# Altium PCB stepperdriver.PcbDoc
Units mil, origin at the board's own origin, x right, y up, seen from the top; angles counter-clockwise.
Board outline 1665 x 1670 mil, 2 copper layers (Top Layer, Bottom Layer); 25 components, 26 nets, 114 pads, 5 vias.
Unrouted connection lines stored in the file: 5.
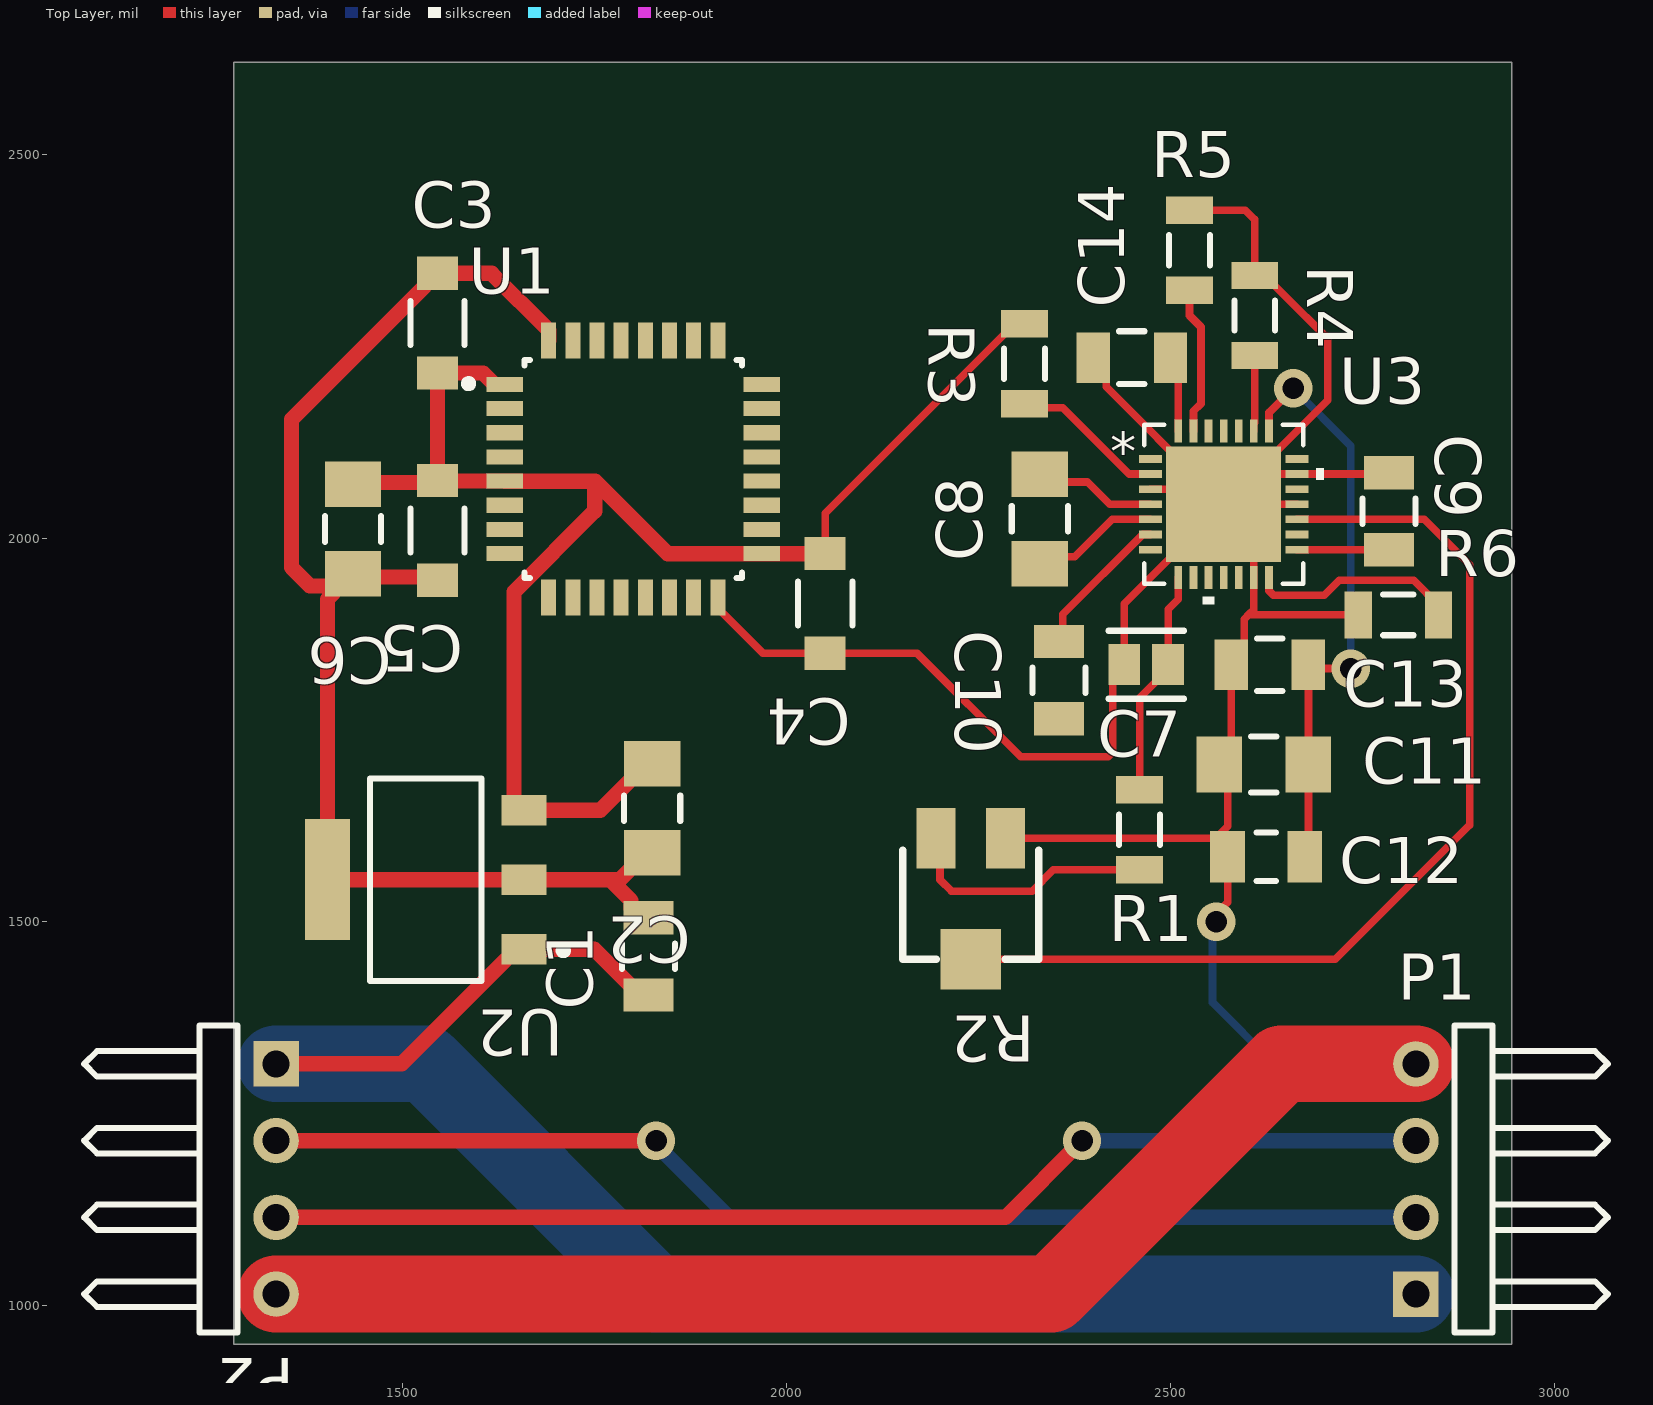
[diagram p0: Top Layer view]
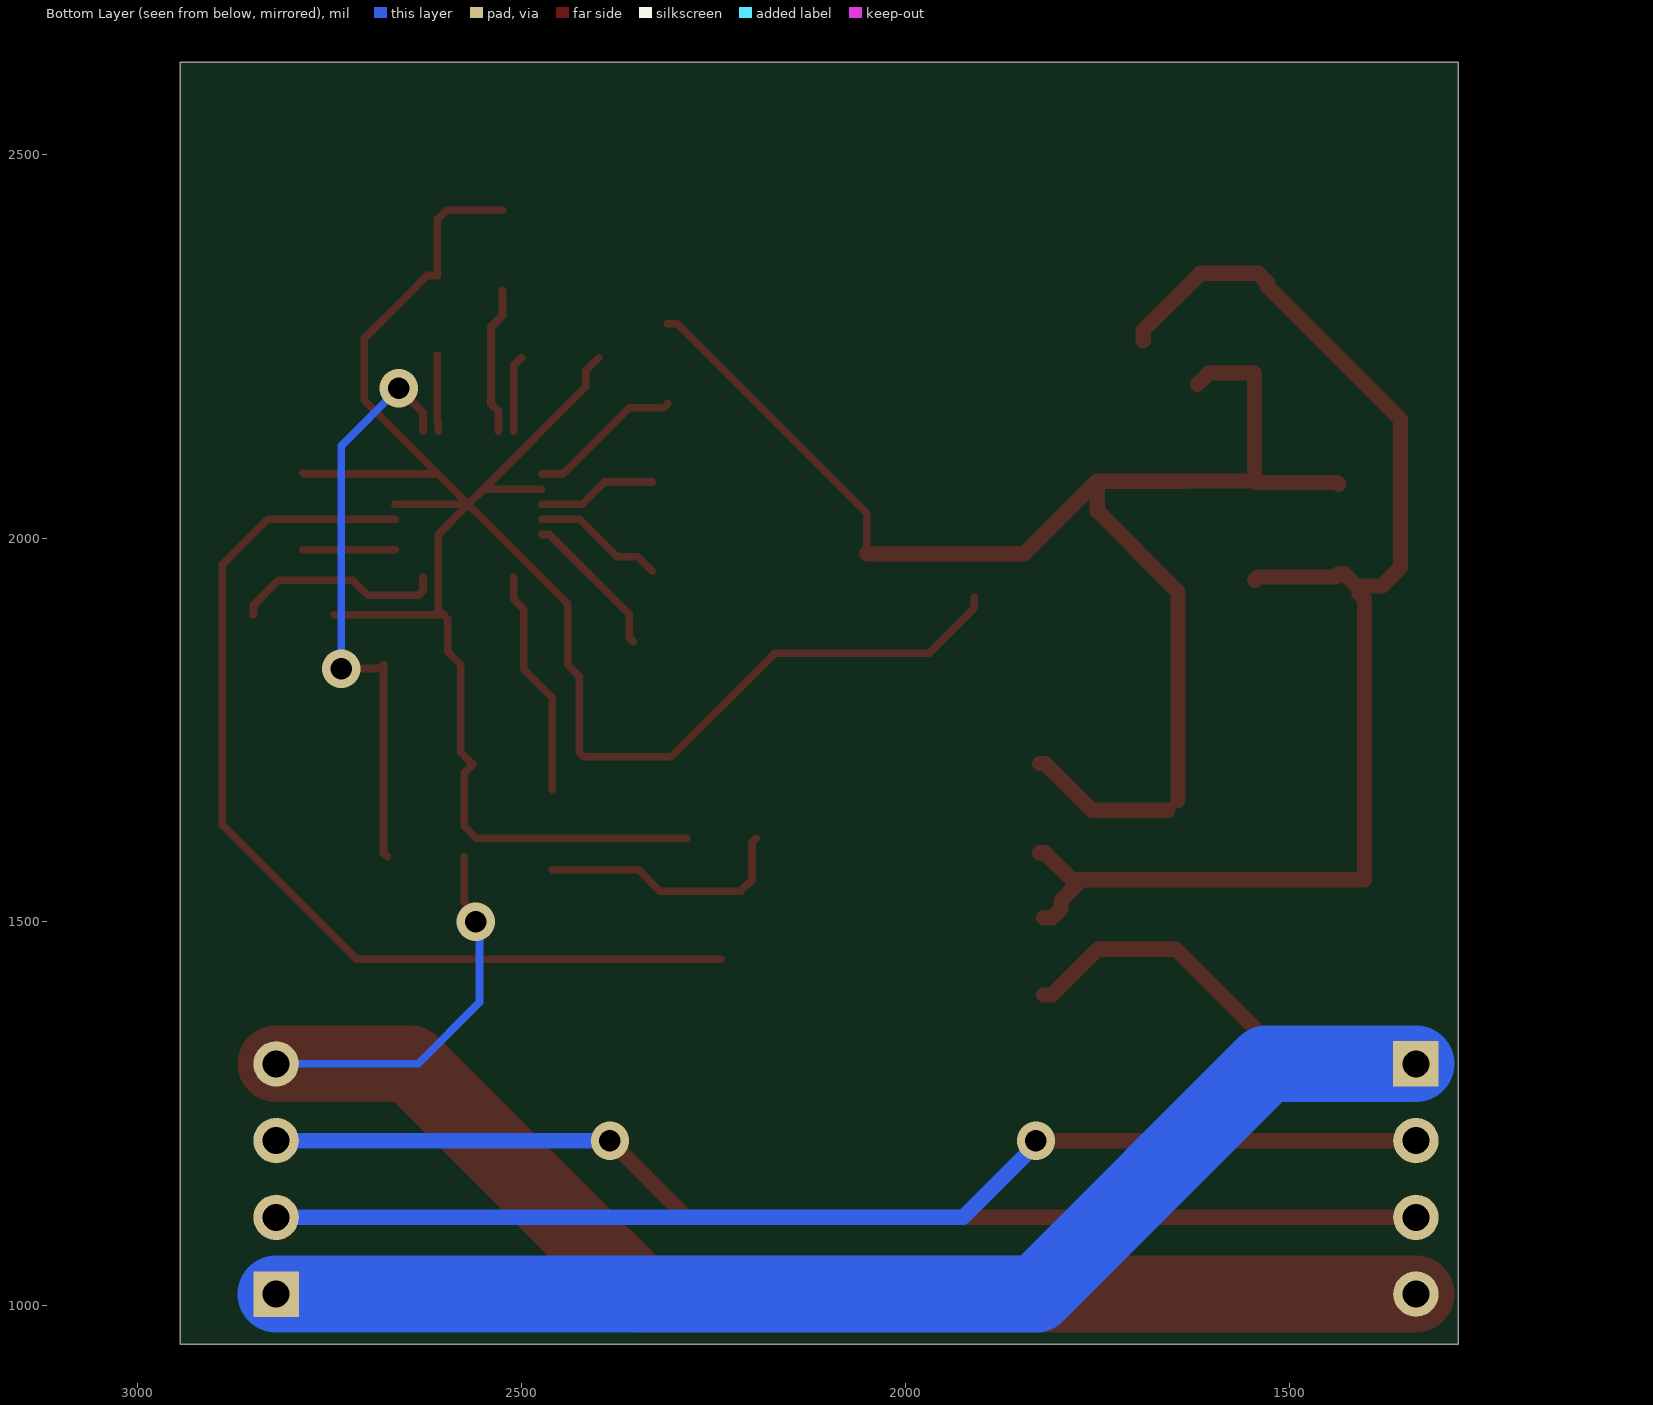
[diagram p1: Bottom Layer view, seen from below]
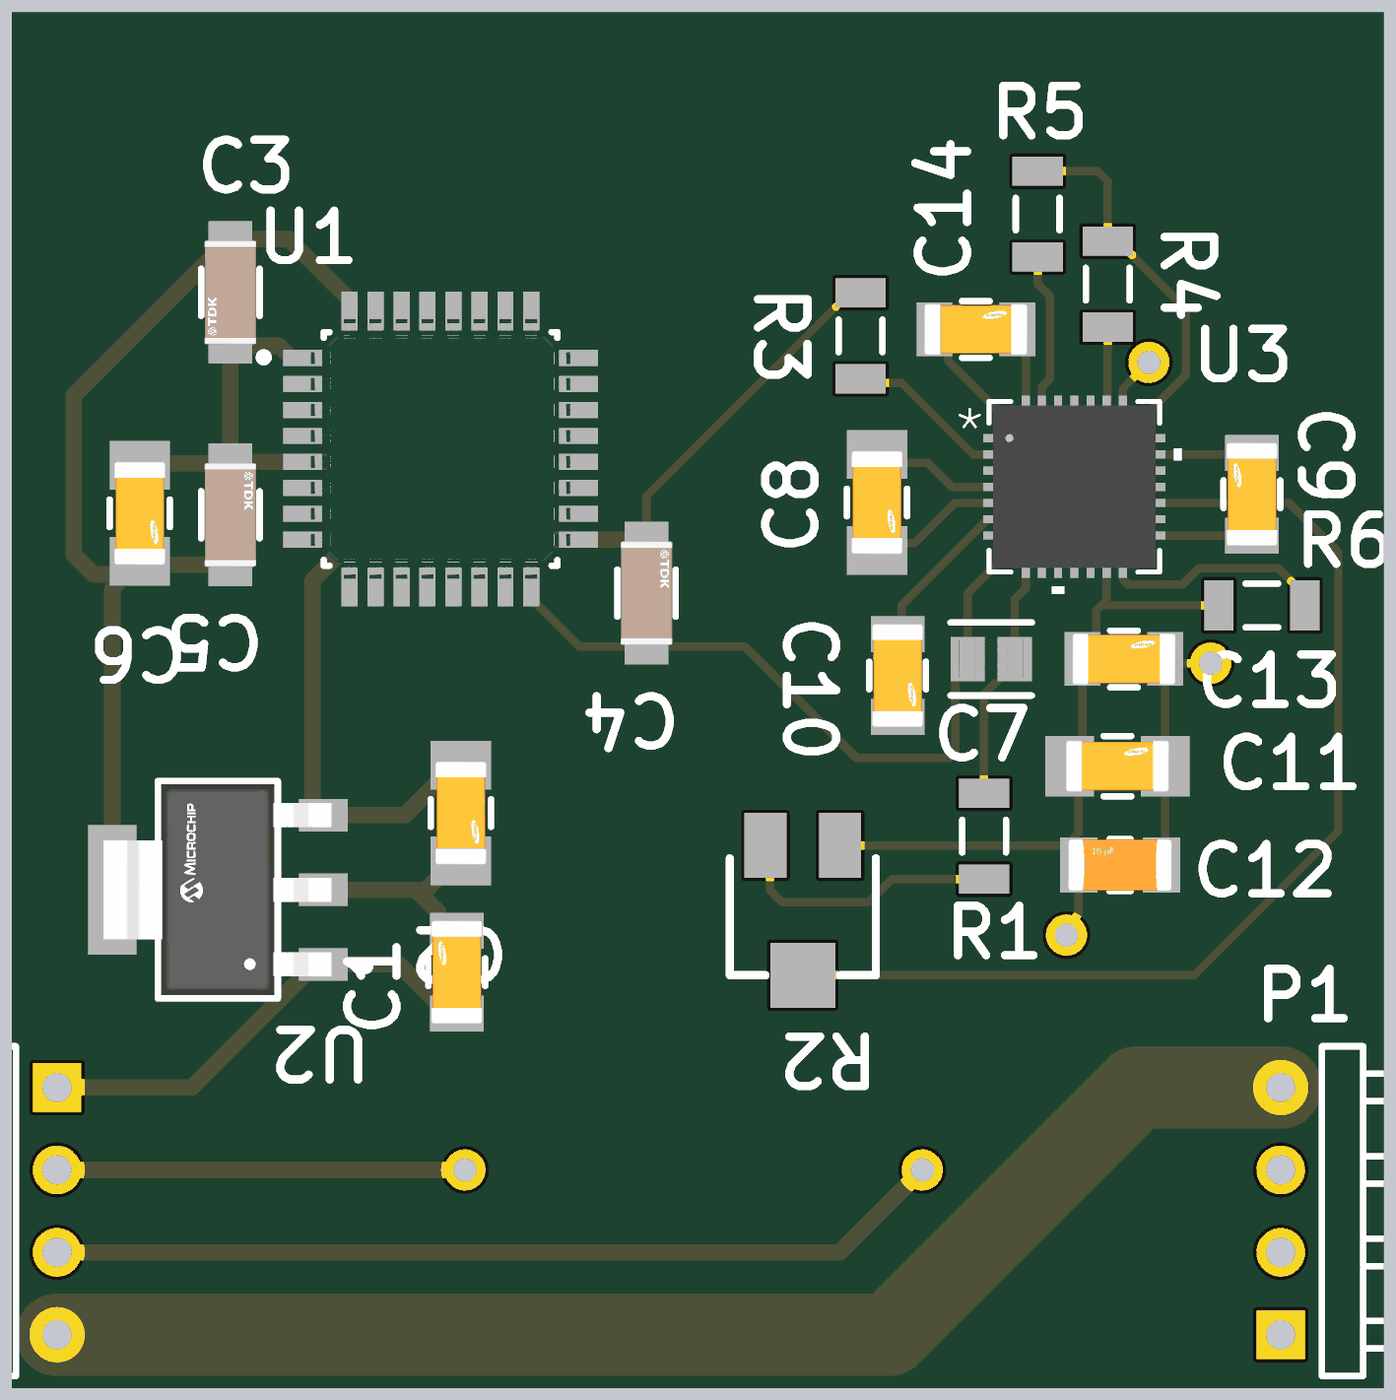
[diagram p2: 3D render of the assembled board from above, using the file's embedded part models]

## Layer stack, top to bottom
Top Solder: solder mask 0.4, Solder Resist, Dk 3.5
Top Layer: signal copper 1.4
Dielectric 1: dielectric 12.6, FR-4, Dk 4.8
Bottom Layer: signal copper 1.4
Bottom Solder: solder mask 0.4, Solder Resist, Dk 3.5

## Board outline
1280,950 2945,950 2945,2620 1280,2620

## Design rules (kind name [scope] priority, off if disabled: settings)
Clearance Clearance_1 [All] p1: gap=0 ignorepadtopadclearanceinfootprint=FALSE
Clearance [All] p2: gap=0 ignorepadtopadclearanceinfootprint=FALSE
PolygonConnect [All] p1: connectstyle=Relief reliefconductorwidth=10 reliefentries=4 polygonreliefangle="90 Angle" airgapwidth=10
RoomDefinition stepperDriver [InComponentClass('stepperDriver')] p1: confinementstyle=ConfineIn formatcopy=TRUE lockcomponents=FALSE outline 2930,960 8720,960 8720,1480 2930,1480
RoutingVias [All] p1: holewidth=28 width=50 viastyle="Through Hole" minholewidth=28 minwidth=50 maxholewidth=28 maxwidth=50
SolderMaskExpansion [All] p1: expansion=4 istentingtop=FALSE
Width [All] p1: maxlimit=200 minlimit=10 preferedwidth=20 minimp=50.000000 maximp=50.000000 favimp=50.000000
30 further rules are at their usual default settings.

## Components (designator, comment, footprint, x,y, rotation, side; value= is the part's Value field where it differs from the comment)
C1 "0.33uF" FP-CL31-IPC_C#1 1820,1455 r90 top
C2 "10uF" FP-CL31-IPC_A 1825,1648.12 r270 top
C3 "0.1uF" FP-CGA5L-MFG 1545.32,2280 r90 top value=100nF
C4 "0.1uF" FP-CGA5L-MFG 2050.32,1915 r270 top value=100nF
C5 "0.1uF" FP-CGA5L-MFG 1545.32,2010 r270 top value=100nF
C6 "1uF" FP-CL31-IPC_A 1435.32,2011.88 r270 top
C7 "4.7uF" FP-CL21-IPC_C 2468.57,1835 r0 top
C8 "22nF" FP-CL31-IPC_A 2330,2025 r270 top
C9 "100nF" FP-CL31-IPC_C#1 2785,2035 r90 top
C10 "100nF" FP-CL31-IPC_C#1 2355,1815 r270 top
C11 "1uF" FP-CL31-IPC_A 2621.88,1705 r0 top
C12 "10uF" FP-CL31-IPC_C#2 2625,1585 r0 top
C13 "100nF" FP-CL31-IPC_C#1 2629.75,1835 r0 top
C14 "100nF" FP-CL31-IPC_C#1 2450,2235 r0 top
P1 "in" HDR1X4H 2820,1015 r90 top
P2 "out" HDR1X4H 1335,1315 r270 top
R1 "20k" RESC3216X70X50LL05T20 2460,1620 r90 top
R2 "20K" RTRIMTS53YJ 2240,1530 r180 top
R3 "20k" RESC3216X70X50LL05T20 2310,2227.17 r270 top
R4 "0r11" RESC3216X70X50LL05T20 2610,2290 r270 top
R5 "0r11" RESC3216X70X50LL05T20 2525,2375 r270 top
R6 "20k" RESC3216X70X50LL05T20 2797.17,1900 r0 top
U1 "STM32L010K8T6" FP-LQFP32-5V-MFG 1800.32,2090 r0 top
U2 "MIC5209-3.3YS-TR" FP-SOT223-3LD-PL-1-MFG 1530,1555 r180 top
U3 "TMC2209-LA" QFN28_5X5_TRI 2569.5,2044.06 r0 top

## Footprints (in the part's own frame and the unit in brackets; to place one, negate y for a bottom-side part, rotate by r counter-clockwise, add the part's x,y. Pads: shape width x height; smd on the part's side, far side on the other; paste and mask are expansions set on the pad)
FP-CGA5L-MFG [mm]
  rect 1.1x1.35 smd paste+0 mask+0: 1(-1.65,0) 2(1.65,0)
  silkscreen extent -0.73,-0.9 0.73,0.9, body extent -2.3,-1 2.3,1, height 0.25
FP-CL21-IPC_C [mil]
  rect 41.52x53.39 smd paste+0 mask+0: 1(-28.57,0) 2(28.57,0)
  silkscreen extent -49,-44 49,44, body extent -53,-32 53,32, height 10
FP-CL31-IPC_A [mil]
  rect 59.27x73.16 smd paste+0 mask+0: 1(-58.12,0) 2(58.12,0)
  silkscreen extent -17,-37 17,37, body extent -107,-56 107,56, height 10
FP-CL31-IPC_C#1 [mil]
  rect 43.52x65.28 smd paste+0 mask+0: 1(-50.25,0) 2(50.25,0)
  silkscreen extent -17,-34 17,34, body extent -76,-38 76,38, height 10
FP-CL31-IPC_C#2 [mil]
  rect 45.45x67.17 smd paste+0 mask+0: 1(-50.23,0) 2(50.23,0)
  silkscreen extent -13,-31 13,31, body extent -77,-39 77,39, height 10
FP-LQFP32-5V-MFG [mm]
  rect 1.2x0.5 smd paste+0 mask+0: 1(-4.25,2.8) 2(-4.25,2) 3(-4.25,1.2) 4(-4.25,0.4) 5(-4.25,-0.4) 6(-4.25,-1.2) 7(-4.25,-2) 8(-4.25,-2.8) 17(4.25,-2.8) 18(4.25,-2) 19(4.25,-1.2) 20(4.25,-0.4) 21(4.25,0.4) 22(4.25,1.2) 23(4.25,2) 24(4.25,2.8)
  rect 0.5x1.2 smd paste+0 mask+0: 9(-2.8,-4.25) 10(-2,-4.25) 11(-1.2,-4.25) 12(-0.4,-4.25) 13(0.4,-4.25) 14(1.2,-4.25) 15(2,-4.25) 16(2.8,-4.25) 25(2.8,4.25) 26(2,4.25) 27(1.2,4.25) 28(0.4,4.25) 29(-0.4,4.25) 30(-1.2,4.25) 31(-2,4.25) 32(-2.8,4.25)
  silkscreen extent -5.57,-3.6 3.6,3.6, body extent -4.95,-4.95 4.95,4.95, height 0.25
FP-SOT223-3LD-PL-1-MFG [mm]
  rect 1.5x1 smd paste+0 mask+0: 1(-3.25,2.3) 2(-3.25,0) 3(-3.25,-2.3)
  rect 1.5x4 smd paste+0 mask+0: 4(3.25,0)
  silkscreen extent -4.68,-3.35 1.85,3.35, body extent -4.1,-3.45 4.1,3.45, height 0.25
HDR1X4H [mm] "Connector; Header; 4 Position; Right Angle"
  rect 1.5x1.5 hole 0.9: 1(0,0)
  round 1.5 hole 0.9: 2(2.54,0) 3(5.08,0) 4(7.62,0)
  silkscreen extent -1.27,-6.35 8.89,-1.27
QFN28_5X5_TRI [mil]
  rect 30x10 smd paste+0 mask+0: 1(-95.5,59.05) 2(-95.5,39.37) 3(-95.5,19.68) 4(-95.5,0) 5(-95.5,-19.69) 6(-95.5,-39.37) 7(-95.5,-59.06) 15(95.5,-59.06) 16(95.5,-39.37) 17(95.5,-19.69) 18(95.5,0) 19(95.5,19.68) 20(95.5,39.37) 21(95.5,59.05)
  rect 10x30 smd paste+0 mask+0: 8(-59.06,-95.5) 9(-39.37,-95.5) 10(-19.68,-95.5) 11(0,-95.5) 12(19.69,-95.5) 13(39.37,-95.5) 14(59.06,-95.5) 22(59.06,95.5) 23(39.37,95.5) 24(19.69,95.5) 25(0,95.5) 26(-19.68,95.5) 27(-39.37,95.5) 28(-59.06,95.5)
  rect 150x150 smd paste-74.5 mask+0: 29(0,0)
  silkscreen extent -104,-130 130,104, body extent -99,-99 99,99, height 65
RESC3216X70X50LL05T20 [mm] "Chip Resistor, 2-Leads, Body 3.20x1.60mm, IPC High Density"
  rect 0.9x1.55 smd: 1(-1.325,0) 2(1.325,0)
  silkscreen extent -0.5,-0.67 0.5,0.67, body extent -1.63,-0.82 1.62,0.82, height 0.7
RTRIMTS53YJ [mm]
  rect 1.3x2 smd: 1(-1.15,-2) 3(1.15,-2)
  rect 2x2 smd: 2(0,2)
  silkscreen extent -2.25,-1.6 2.25,2

## Part data
C1: library part CMP-13271-000138-1, "Cap Ceramic 330pF 50V C0G ±5% SMD 1206 +125°C Embossed T/R", Capacitance=330pF, Case Code (Imperial)=1206, Case Code (Metric)=3216, Dielectric=C0G, Max Operating Temperature=125°C, Min Operating Temperature=-55°C, Package Quantity=1, Temperature Coefficient=300ppm/°C, Tolerance=5%, Voltage=50V, Case/Package=1206, Depth=1.6mm, Height=0.85mm, Length=3.2mm, Material=Ceramic, Mount="Surface Mount", Packaging="Tape and Reel", Radiation Hardening=No, Thickness=0.039inch, Voltage Rating=50V, Width=0.063inch
C2: library part CMP-13271-002819-1, "Cap Ceramic 10uF 16V X5R ±10% SMD 1206 +85°C Embossed T/R", Case Code (Imperial)=1206, Case Code (Metric)=3216, Dielectric=X5R, Max Operating Temperature=85°C, Min Operating Temperature=-55°C, Tolerance=10%, Voltage=16V, Capacitance=10uF, Case/Package=1206, Contact Plating=Tin, Depth=1.6mm, Height=1.6mm, Lead Free="Lead Free", Length=3.2mm, Material=Ceramic, Mount="Surface Mount", Packaging="Tape and Reel", Radiation Hardening=No, Thickness=0.071inch, Voltage Rating=16V, Voltage Rating (DC)=16V, Width=0.063inch
C3 C4 C5: library part CMP-08246-000029-1, "CAP CER 0.1UF 50V C0G 1206", Capacitance=100nF, Manufacturer=TDK, Manufacturer Part Number=CGA5L2C0G1H104J160AA, Package=CGA5L, Temperature="-55°C to +125°C", Temperature Characteristic=C0G, Temperature Coefficient=30ppm/°C, Temperature Range High=+125°C, Temperature Range Low=-55°C, Tolerance=5%, Voltage Rating=50V, Automotive=Yes, Automotive Grade="Grade 1", Category=Cap, ComponentLink2Description=Datasheet, ComponentLink2URL=https://product.tdk.com/info/en/catalog/datasheets/mlcc_automotive_general_en.pdf, Device Class L1="Passive Components", Device Class L2=Capacitors, Device Class L3="Ceramic Capacitors", Digikey Description="CAP CER 0.1UF 50V C0G 1206", Height=1.8mm, Ipc Land Pattern Name=CAPC320160X160, Lead Free=Yes, Material=Ceramic, Mouser Description="Eia Case Size: 1206, Voltage: 50, Cap Value: 100000, Tol: +/-5%, Thickness: 1.60 ± 0.20", Octopart=https://octopart.com/cga5l2c0g1h104j160aa-tdk-26014808, RoHS=TRUE
C6 C11: library part CMP-13271-003959-1, "Cap Ceramic 1uF 16V Y5V -20/+80% SMD 1206 +85°C Embossed T/R", Case Code (Imperial)=1206, Case Code (Metric)=3216, Dielectric=Y5V, Max Operating Temperature=85°C, Min Operating Temperature=-30°C, Package Quantity=4000, Tolerance=80%, Voltage Rating=16V, Capacitance=1uF, Case/Package=1206, Depth=1.6mm, Height=0.85mm, Lead Free="Lead Free", Length=3.2mm, Mount="Surface Mount", Packaging="Tape and Reel", Radiation Hardening=No, Thickness=0.039inch, Voltage Rating (DC)=16V, Width=0.063inch
C7: library part CMP-13271-004306-1, "CL21 Series 0805 4.7uF 50V ±10% Tolerance X5R Multilayer Ceramic Chip Capacitor", Case Code (Imperial)=0805, Case Code (Metric)=2012, Dielectric=X5R, Max Operating Temperature=85°C, Min Operating Temperature=-55°C, Package Quantity=1, Tolerance=10%, Voltage Rating=50V, Capacitance=4.7uF, Case/Package=0805, Depth=1.25mm, Length=2mm, Mount="Surface Mount", Packaging="Tape and Reel", Radiation Hardening=No, RoHS Compliant=Yes, Series=CL, Thickness=0.055inch, Width=0.049inch
C8: library part CMP-13271-002163-1, "Cap Ceramic 22nF 50V X7R ±10% SMD 1206 +125°C Embossed T/R", Case Code (Imperial)=1206, Case Code (Metric)=3216, Dielectric=X7R, Max Operating Temperature=125°C, Min Operating Temperature=-55°C, Package Quantity=1, Tolerance=10%, Voltage=50V, Capacitance=22nF, Case/Package=1206, Depth=1.6mm, Height=0.85mm, Length=3.2mm, Material=Ceramic, Mount="Surface Mount", Packaging="Tape and Reel", Radiation Hardening=No, Thickness=0.039inch, Voltage Rating=50V, Width=0.063inch
C9 C10 C13 C14: library part CMP-13271-001731-1, "Cap Ceramic 100nF 50V X7R ±10% SMD 1206 +125°C Embossed T/R", Case/Package=1206, Dielectric=X7R, Max Operating Temperature=125°C, Min Operating Temperature=-55°C, Package Quantity=15000, Tolerance=10%, Voltage=50V, Capacitance=100nF, Depth=1.6mm, Height=0.85mm, Lead Free="Lead Free", Length=3.2mm, Mount="Surface Mount", Packaging="Tape and Reel", Radiation Hardening=No, Thickness=0.037inch, Voltage Rating=50V, Voltage Rating (DC)=50V, Width=0.063inch
C12: library part CMP-13271-000016-1, "CAP CER 10UF 50V X5R 1206", Manufacturer=Samsung, Manufacturer Part Number=CL31A106KBHNNNE, Package=CL31, Temperature="-55°C to +85°C", Temperature Characteristic=X5R, Temperature Coefficient=15%, Temperature Range High=+85°C, Temperature Range Low=-55°C, Tolerance=10%, Voltage=50V, Automotive=No, Capacitance=10uF, Category=Cap, ComponentLink2Description=Datasheet, ComponentLink2URL=http://www.samsungsem.com/kr/support/product-search/mlcc/__icsFiles/afieldfile/2018/06/21/CL31A106KBHNNNE.pdf, Device Class L1="Passive Components", Device Class L2=Capacitors, Device Class L3="Ceramic Capacitors", Digikey Description="CAP CER 10UF 50V X5R 1206", Height=1.8mm, Ipc Land Pattern Name=CAPC320160X160, Lead Free=Yes, Material=Ceramic, Octopart=https://octopart.com/cl31a106kbhnnne-samsung-19832778, RoHS=TRUE, Voltage Rating=50V
P1 P2: library part "Header 4H", "Header, 4-Pin, Right Angle", LatestRevisionDate=17-Jul-2002, LatestRevisionNote="Re-released for DXP Platform.", Publisher="Altium Limited"
R1 R3 R6: library part CMP-1014-00105-2, Manufacturer=Panasonic, Part Number=ERJ-8GEYJ203V
R2: library part TS53YJ, Package=None, Availability=Unavailable, MF="{'manufacturer': u'Vishay Sfernice'}", MP=TS53YJ, Price=None
R4 R5: library part CMP-2003-00787-1, Manufacturer=Panasonic, Part Number=ERJ8CWFR011V
U1: library part CMP-12105-000073-1, "16/32-BITS MICROS", Ambient Temperature Range High=+85°C, Ambient Temperature Range Low=-40°C, Frequency=32MHz, Manufacturer=STMicroelectronics, Max Junction Temp=+105°C, Max Supply Voltage=3.6V, Min Supply Voltage=1.8V, Package=LQFP32-5V, Temperature="-40°C to +85°C", Automotive=No, Category=IC, ComponentLink2Description=Datasheet, ComponentLink2URL=https://www.st.com/resource/en/datasheet/stm32l010k8.pdf, Core Architecture="Arm Cortex-M0+", Data Bus Width=32bits, Device Class L1="Integrated Circuits (ICs)", Device Class L2="Embedded Processors and Controllers", Device Class L3=Microcontrollers, Digikey Description="16/32-BITS MICROS", Height=1.6mm, Interface=I2C,SPI,UART,USART,IrDA,SMBus, Lead Free=Yes, Manufacturer Part Number=STM32L010K8T6, Memory Size=64KBytes, Memory Type=FLASH,SRAM,EEPROM, Mouser Description="Cortex M0+ 64K LQFP32 85°C", Number Of A/D Converters=1, Number Of Adc Channels=16, Number Of Cores=1, Number Of I2C Channels=1, Number Of I/Os=25, Number Of Spi Channels=1, Number Of Timers/Counters=5, Number Of Uart Channels=2, Octopart=https://octopart.com/stm32l010k8t6-stmicroelectronics-96493834, Ram Size=8KBytes, RoHS=TRUE, Standoff Height=0.05mm, Temperature Range High=+85°C, Temperature Range Low=-40°C
U2: library part CMP-06324-000084-1, "IC REG LINEAR 3.3V 500MA SOT223", Case/Package=SOT-223, Dropout Voltage=350mV, Max Input Voltage=16V, Max Operating Temperature=125°C, Min Input Voltage=2.5V, Min Operating Temperature=-40°C, Nominal Output Voltage=3.3V, Output Current=500mA, Lead Free="Lead Free", Mount="Surface Mount", Number of Pins=3, Number of Regulators=1, Output Type=Fixed, Output Voltage=3.3V, Packaging="Cut Tape", REACH SVHC="No SVHC"
U3: "No Description Available", Mfr_Name=Trinamic, Copyright="Copyright (C) 2022 Ultra Librarian. All rights reserved.", Manufacturer_Part_Number=TMC2209-LA, RefDes=RefDes, Type=DEV

## Via types
v1: diameter 50, hole 28, Top Layer to Bottom Layer, 5 vias

## Nets (pads, with @x,y where several pads share a name; then routed paths per layer and width w, separated by ;. In a path a pad name is that pad's centre, name@x,y a point inside that pad or via, vN(x,y) a via of type N, cw(c..) or ccw(c..) an arc to the next point about the centre after c; other vN are vias at no path point)
3V3: C2.1 C3.1 C4.1 C5.1 C6.1 C9.1 R3.1 U1.1 U1.5 U1.17 U2.3 U3.15 | length 2081.3
  Top Layer w10: U2.3@1645,1658.5 U2.3 ; C4.1 2050.32,2032.44 2297.2,2279.33 R3.1 ; U3.15 2675,1985 2675.25,1984.75 C9.1
  Top Layer w20: C6.1 1437.8,2072.48 1542.84,2072.48 C5.1 ; U1.1@1619.53,2200.24 1604.72,2215.04 C3.1 C5.1 ; U2.3@1645,1658.5 1645,1930 1750,2035 1750,2074.25 ; U2.3 1757.36,1645.55 1818.06,1706.25 C2.1 ; C4.1 2050.12,1979.76 U1.17 1845.24,1979.76 1750.75,2074.25 1750,2074.25 ; C5.1 1545.87,2074.41 1632.83,2074.41 U1.5 1750,2074.25
+5: C7.2 R1.2 U3.8 | length 297.3
  Top Layer w10: R1.2 2460,1791.92 2497.15,1829.06 C7.2 2497.15,1907.15 2510.44,1920.44 U3.8
GND: C1.2 C2.2 C3.2 C4.2 C5.2 C6.2 C7.1 C9.2 C11.1 C12.1 C13.1 C14.1 P1.4 P2.4 R2.1 R4.1 R5.1 R6.1 U1.16 U1.32 U2.2 U2.4 U3.3 U3.13 U3.18 U3.20 U3.29 | length 6936.5
  Top Layer w10: U1.16 1910.55,1908.9 1969.41,1850.04 C4.2 2169.96,1850.04 2305,1715 2419.14,1715 2425,1720.86 2425,1820 C7.1 2440,1914.56 U3.29 ; R2.1 2559.14,1608.74 2574.77,1624.37 2574.77,1693.98 C11.1 2579.5,1720.75 C13.1 2596.26,1851.76 2596.26,1894.3 2602.57,1900.6 ; C14.1 2416.51,2218.24 2416.51,2197.04 U3.29@2549.82,2063.74 ; U3.3 U3.29@2549.82,2063.74 ; R5.1 2597.83,2427.17 2610,2415 R4.1 2622.8,2342.17 2647.89,2317.07 ; v1(2560,1500) 2560,1510.82 2574.77,1525.59 C12.1 ; 2647.93,2317.07 2705,2260 2705,2179.56 U3.29@2608.87,2083.43 ; U3.18 U3.29 ; R6.1 2603.17,1900 2602.57,1900.6 ; C9.2 2783.18,2083.43 U3.20 U3.29@2608.87,2083.43 ; U3.29@2549.82,2063.74 U3.29 ; U3.29 U3.29@2608.87,2083.43 ; U3.29 2608.87,2004.69 U3.13 2608.87,1906.9 2602.57,1900.6
  Top Layer w20: C5.2 1540.96,1949.4 1439.67,1949.4 C6.2 1428.37,1953.75 C6.2@1412.29,1937.67 ; U1.32 1690.08,2270.79 1615.9,2344.96 C3.2 1540.39,2344.96 1528.74,2333.31 1528.74,2328.39 1355,2154.64 1355,1961.72 1379.05,1937.67 C6.2@1412.29,1937.67 ; C1.2 1809.12,1505.25 1797.36,1517.01 1797.36,1527.89 1770.25,1555 ; C2.2 1818.06,1590 1783.06,1555 1770.25,1555 ; C6.2@1412.29,1937.67 1408.74,1934.12 1408.74,1927.17 1402.05,1920.48 U2.4 U2.2 1770.25,1555
  Top Layer w100: P2.4 2345,1015 2645,1315 P1.4
  Bottom Layer w10: v1(2560,1500) 2555,1495 2555,1395 2635,1315 P1.4
NetC1_1: C1.1 C10.2 C11.2 C12.2 C13.2 C14.2 P1.1 P2.1 U2.1 U3.22 U3.28 | length 3054.1
  Top Layer w10: C14.2 2510.44,2224.81 U3.28 ; U3.22 2628.56,2163.56 v1(2660,2195) ; C12.2 2680,1589.77 C11.2 C13.2 2685,1830 v1(2735,1830)
  Top Layer w20: P2.1 1498.66,1315 1648.11,1464.45 U2.1 1749.42,1464.45 1809.12,1404.75 C1.1
  Bottom Layer w10: v1(2660,2195) 2735,2120 v1(2735,1830)
  Bottom Layer w100: P2.1 1530,1315 1830,1015 P1.1
NetC8_1: C8.1 U3.4 | length 156
  Top Layer w10: C8.1@2330,2073.12 2391.88,2073.12 2420.94,2044.06 U3.4
NetC8_2: C8.2 U3.5 | length 172
  Top Layer w10: C8.2@2330,1956.88 2348.85,1975.72 2375.72,1975.72 2424.37,2024.37 U3.5
NetC10_1: C10.1 U3.6 | length 194.6
  Top Layer w10: C10.1 2360,1870.25 2360,1900.69 2464,2004.69 U3.6
NetP1_2: P1.2 P2.2 | length 1529.4
  Top Layer w20: P2.2 v1(1830,1215)
  Bottom Layer w20: v1(1830,1215) 1830,1210 1925,1115 P1.2
NetP1_3: P1.3 P2.3 | length 1526.4
  Top Layer w20: P2.3 2285,1115 v1(2385,1215)
  Bottom Layer w20: v1(2385,1215) P1.3
NetR1_1: R1.1 R2.3 | length 333.7
  Top Layer w10: R2.3 2200,1603.46 2200,1555 2215,1540 2319.95,1540 2347.78,1567.83 R1.1
NetR2_2: R2.2 U3.17 | length 1310.8
  Top Layer w10: R2.2 2715,1451.26 2890,1626.26 2890,1965 2830.63,2024.37 U3.17
NetR3_2: R3.2 U3.2 | length 201.9
  Top Layer w10: R3.2 2315,2170 2360,2170 2446.57,2083.43 U3.2
NetR4_2: R4.2 U3.23 | length 98.7
  Top Layer w10: U3.23 2608.87,2149.56 2610,2150.69 R4.2
NetR5_2: R5.2 U3.27 | length 193.6
  Top Layer w10: R5.2 2525,2290 2540,2275 2540,2175 2530.13,2165.13 U3.27
NetR6_2: R6.2 U3.14 | length 274.6
  Top Layer w10: U3.14 2628.56,1931.44 2634.49,1925.51 2700.51,1925.51 2720,1945 2817.13,1945 2849.33,1912.8 R6.2
NetU3_1: U3.1
NetU3_7: U3.7
NetU3_9: U3.9
NetU3_10: U3.10
NetU3_11: U3.11
NetU3_12: U3.12
NetU3_16: U3.16
NetU3_19: U3.19
NetU3_21: U3.21
NetU3_24: U3.24
NetU3_26: U3.26
pads on no net: U1.2 U1.3 U1.4 U1.6 U1.7 U1.8 U1.9 U1.10 U1.11 U1.12 U1.13 U1.14 U1.15 U1.18 U1.19 U1.20 U1.21 U1.22 U1.23 U1.24 U1.25 U1.26 U1.27 U1.28 U1.29 U1.30 U1.31 U3.25

## Text inside footprints (layer, text, board x,y; h text height)
U3: Top 3D Body "*" at 2476.5,2087.95 h50; Top Overlay "*" at 2421.5,2087.95 h50